# Altium PCB dsPIC33_CPU_ETH_Unit.PcbDoc (part 1 of 2)
Units mm, origin at the board's own origin, x right, y up, seen from the top; angles counter-clockwise.
Board outline 63.98 x 127 mm, 2 copper layers (Top Layer, Bottom Layer), stack 1.036 mm thick; 58 components, 100 nets, 442 pads, 227 vias.
Unrouted connection lines stored in the file: 57.
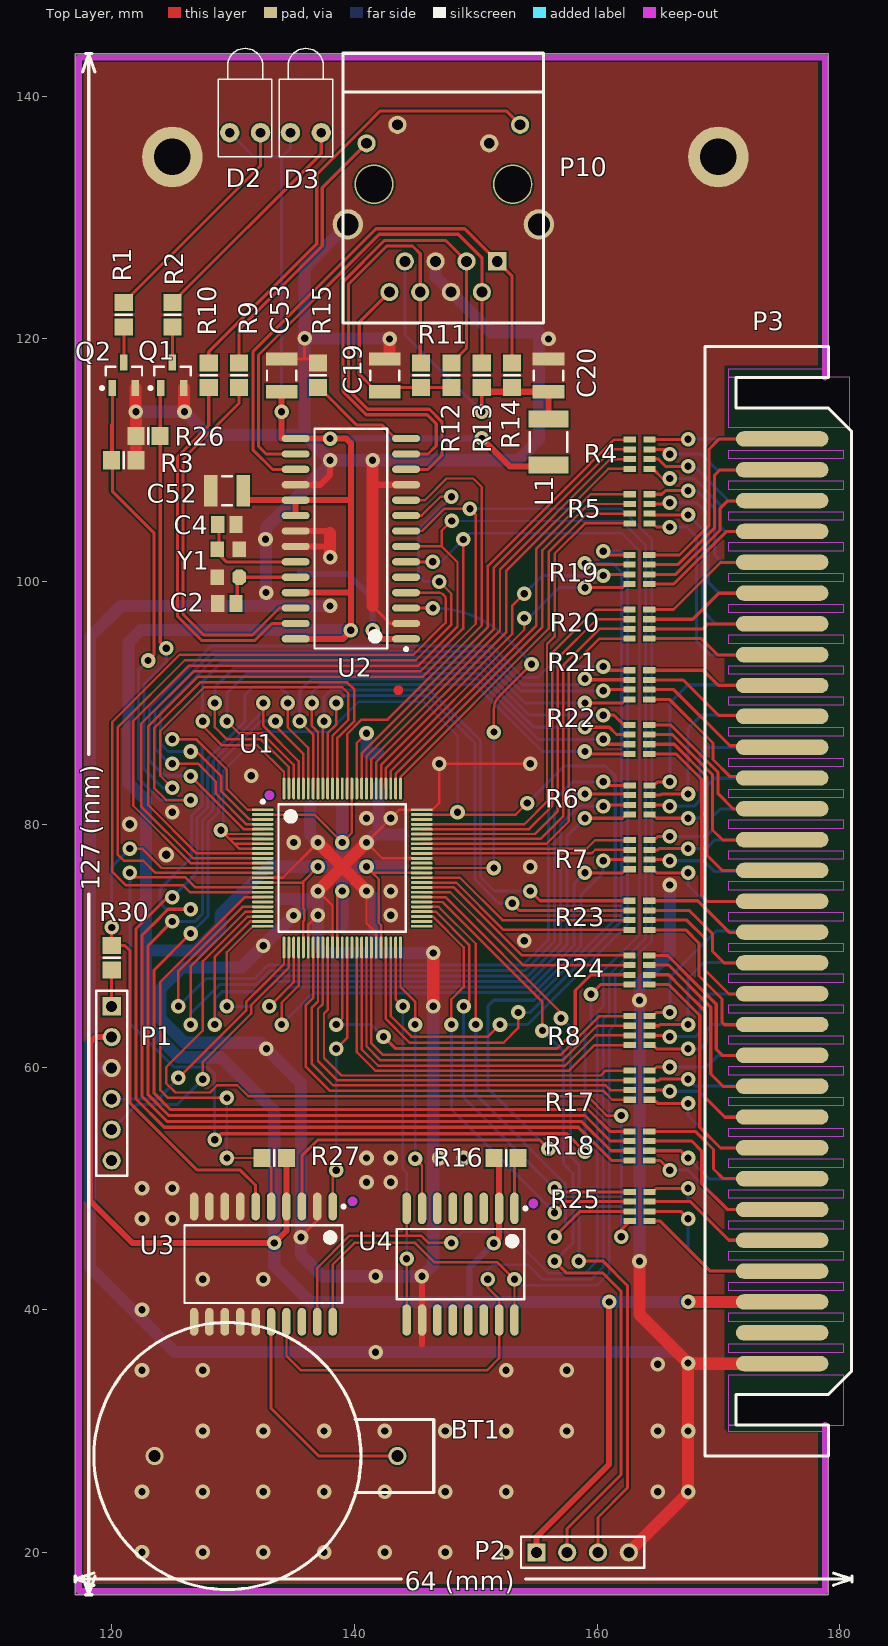
[diagram p0: Top Layer view]
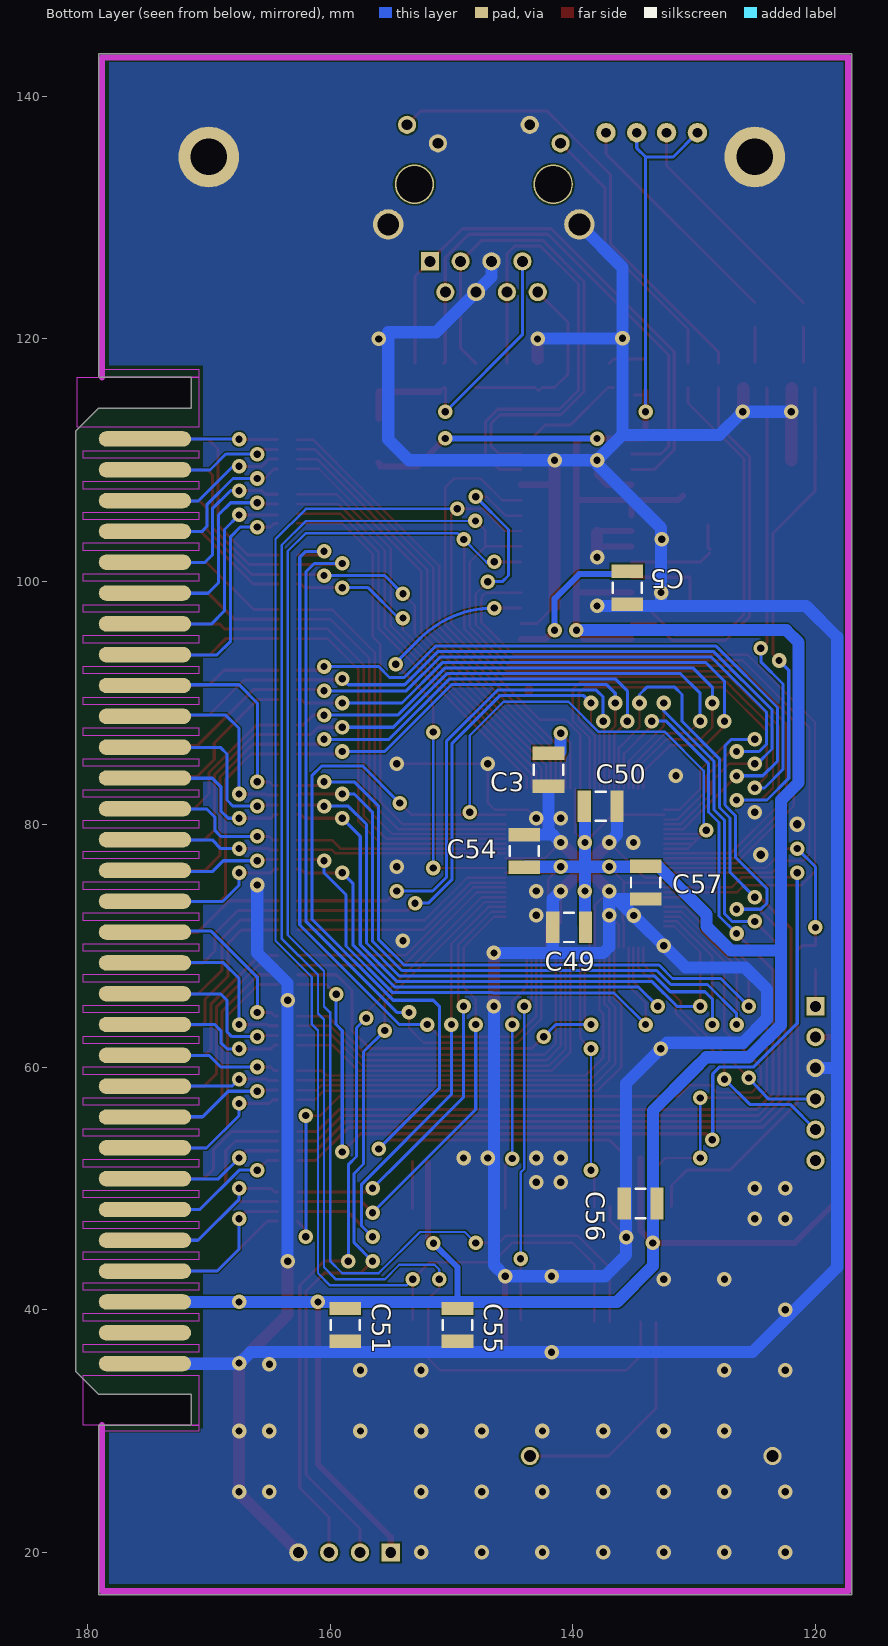
[diagram p1: Bottom Layer view, seen from below]

## Layer stack, top to bottom
Top Layer: signal copper 0.018
Dielectric: core 1, FR-4, Dk 4.8
Bottom Layer: signal copper 0.018

## Board outline
179.07,143.51 179.07,116.84 171.45,116.84 171.45,114.3 179.07,114.3 180.975,112.395 180.975,34.925 179.07,33.02 171.45,33.02 171.45,30.48 179.07,30.48 179.07,16.51 117,16.51 117,143.51

## Design rules (kind name [scope] priority, off if disabled: settings)
Clearance [All] p1: gap=0.14
ComponentClearance [All] p1: gap=0 collisioncheckmode=3 verticalgap=0 showdistances=FALSE
PlaneClearance [All] p1: clearance=0.5
PlaneConnect [All] p1: planeconnectstyle=Direct reliefexpansion=0.508 reliefentries=4 reliefconductorwidth=0.254 reliefairgap=0.254
PolygonConnect [All] p1: connectstyle=Direct reliefconductorwidth=0.254 reliefentries=4 polygonreliefangle="90 Angle"
RoutingCorners [All] p1: cornerstyle=Round minsetback=2.5 maxsetback=2.5
RoutingVias [All] p1: holewidth=0.7 width=1.2 viastyle="Through Hole" minholewidth=0.3 minwidth=0.8 maxholewidth=0.7 maxwidth=1.2
SMDNeckDown [All] p1: percent=300.000
SilkscreenOverComponentPads [All] p1: minsilkscreentomaskgap=0.254
SolderMaskExpansion [All] p1: expansion=0.102
Width [All] p1: maxlimit=1 minlimit=0.2 preferedwidth=0.2 checkconnectedcopper=TRUE
23 further rules are at their usual default settings.

## Components (designator, comment, footprint, x,y, rotation, side; value= is the part's Value field where it differs from the comment)
BT1 "Battery" "Battery Pad" 129.54,27.94 r0 top locked
C2 "Cap" CAPC2012L 129.5,98.2 r180 top
C3 "Cap" CAPC3225L 142,84.5 r90 bottom locked
C4 "Cap" CAPC2012L 129.5,104.7 r180 top
C5 "Cap" CAPC3225L 135.5,99.5 r270 bottom
C19 "Cap" CAPC3225L 142.5,117 r270 top
C20 "Cap" CAPC3225L 156,117 r270 top
C49 "Cap" CAPC3225L 140.3,71.5 r0 bottom
C50 "Cap" CAPC3225L 137.7,81.5 r180 bottom
C51 "Cap" CAPC3225L 158.75,38.75 r270 bottom
C52 "Cap" CAPC3225L 129.5,107.5 r180 top
C53 "Cap" CAPC3225L 134,117 r90 top
C54 "Cap" CAPC3225L 144,77.8 r90 bottom
C55 "Cap" CAPC3225L 149.5,38.75 r270 bottom
C56 "Cap" CAPC3225L 134.405,48.75 r0 bottom
C57 "Cap" CAPC3225L 134,75.2 r270 bottom
D2 "LED1" LED-1 131,137 r90 top
D3 "LED1" LED-1 136,137 r90 top
L1 "Inductor" INDC4532L 156,111.5 r90 top
P1 "Программатор" HDR1X6 120,65 r270 top
P2 "I2C" HDR1X4 155,20 r0 top
P3 "31x2 Slot" SL-62 180.34,35.56 r90 top
P10 "J00-0063NL" EthernetCON 147.332,132.748 r90 top
Q1 "BSS123" SOT23_N 125,117 r90 top
Q2 "BSS123" SOT23_N 121,117 r90 top
R1 "Res2" RESC2012M 121,122 r270 top
R2 "Res2" RESC2012M 125,122 r270 top
R3 "Res2" RESC2012M 121,110 r0 top
R4 "CAT16" CAT16 163.5,110.5 r270 top
R5 "CAT16" CAT16 163.5,106 r270 top
R6 "CAT16" CAT16 163.5,82 r270 top
R7 "CAT16" CAT16 163.5,77.5 r270 top
R8 "CAT16" CAT16 163.5,63 r270 top
R9 "Res2" RESC2012M 130.5,117 r90 top
R10 "Res2" RESC2012M 128,117 r90 top
R11 "Res2" RESC2012M 145.5,117 r90 top
R12 "Res2" RESC2012M 148,117 r90 top
R13 "Res2" RESC2012M 150.5,117 r90 top
R14 "Res2" RESC2012M 153,117 r90 top
R15 "Res2" RESC2012M 137,117 r270 top
R16 "Res2" RESC2012M 152.5,52.5 r180 top
R17 "CAT16" CAT16 163.5,58.5 r270 top locked
R18 "CAT16" CAT16 163.5,53.5 r90 top locked
R19 "CAT16" CAT16 163.5,101 r90 top
R20 "CAT16" CAT16 163.5,96.5 r90 top
R21 "CAT16" CAT16 163.5,91.5 r90 top
R22 "CAT16" CAT16 163.5,87 r90 top
R23 "CAT16" CAT16 163.5,72.5 r90 top
R24 "CAT16" CAT16 163.5,68 r90 top
R25 "CAT16" CAT16 163.5,48.5 r270 top
R26 "Res2" RESC2012M 123,112 r180 top
R27 "Res2" RESC2012M 133.4,52.5 r0 top
R30 "Res2" RESC2012M 120,69 r90 top
U1 "DSPIC33FJ256MC710T-I/PF" TQFP-PT100_N 139,76.4 r0 top locked
U2 "ENC28J60-I/SO" SOIC-SO28_N 139.712,103.538 r180 top
U3 "DS3234" SOIC20_M 132.5,43.75 r270 top locked
U4 "M25P128" SOIC127P1030-16M 148.75,43.75 r270 top locked
Y1 "Кварцевый резонатор" "HC 49SM" 130.512,100.363 r90 top

## Footprints (in the part's own frame and the unit in brackets; to place one, negate y for a bottom-side part, rotate by r counter-clockwise, add the part's x,y. Pads: shape width x height; smd on the part's side, far side on the other; paste and mask are expansions set on the pad)
"Battery Pad" [mm]
  round 1.5 hole 1: 1(14,0) 2(-6,0)
  silkscreen extent -11,-11 17,11, body extent -10.91,-10.98 17,10.98, height 6
CAPC2012L [mm] "Chip Capacitor, Body 2.0x1.3mm, IPC High Density"
  rect 1.1x1.4 smd: 1(-0.75,0) 2(0.75,0)
  body extent -1.1,-0.72 1.1,0.72, height 1.4
CAPC3225L [mm] "Chip Capacitor, Body 3.2x2.5mm, IPC High Density"
  rect 1.1x2.6 smd: 1(-1.35,0) 2(1.35,0)
  silkscreen extent -0.4,-1.2 0.4,1.2, body extent -1.7,-1.35 1.7,1.35, height 1.5
CAT16 [mm]
  rect 0.5x1 smd: 1(-1.2,-0.8) 2(-0.4,-0.8) 3(0.4,-0.8) 4(1.2,-0.8) 5(1.2,0.825) 6(0.4,0.825) 7(-0.4,0.825) 8(-1.2,0.825)
  body extent -1.75,-0.8 1.75,0.75, height 0.5
EthernetCON [mm] "Ethernet connector w/two LEDs"
  rect 1.5x1.5 hole 0.9: 1(-6.35,-4.445)
  round 1.5 hole 0.9: 2(-8.89,-3.175) 3(-6.35,-1.905) 4(-8.89,-0.635) 5(-6.35,0.635) 6(-8.89,1.905) 7(-6.35,3.175) 8(-8.89,4.445) 9(4.902,-6.325) 10(3.378,-3.785) 11(4.902,3.785) 12(3.378,6.325)
  round 2.5 hole 1.8: 13(-3.302,-7.874) 14(-3.302,7.874)
  round 3.25 hole 3 unplated: 15(0,-5.715) 16(0,5.715)
  silkscreen extent -11.43,-8.25 10.79,8.25, body extent -11.43,-8.25 11,8.25, height 13.97
"HC 49SM" [mm] "Кварцевый резонатор"
  oct 1.3x1.1 smd: 1(0,0)
  rect 1.3x1.1 smd: 2(2.3,0) 3(2.3,1.8) 4(0,1.8)
  body extent -0.45,-0.38 2.75,2.12, height 1.2
HDR1X4 [mm] "Connector; Header; 4 Position"
  rect 1.5x1.5 hole 0.9: 1(0,0)
  round 1.5 hole 0.9: 2(2.54,0) 3(5.08,0) 4(7.62,0)
  silkscreen extent -1.27,-1.27 8.89,1.27
HDR1X6 [mm] "Connector; Header; 6 Position"
  rect 1.5x1.5 hole 0.9: 1(0,0)
  round 1.5 hole 0.9: 2(2.54,0) 3(5.08,0) 4(7.62,0) 5(10.16,0) 6(12.7,0)
  silkscreen extent -1.27,-1.27 13.97,1.27
INDC4532L [mm] "Chip Inductor, Body 4.5x3.2mm, IPC High Density"
  rect 1.4x3.3 smd: 1(-1.9,0) 2(1.9,0)
  silkscreen extent -0.8,-1.55 0.8,1.55, body extent -2.4,-1.7 2.4,1.7, height 0.55
LED-1 [mm] "Typical RED GaAs LED; 2 Leads"
  round 1.6 hole 0.8: 1(0,1.27) 2(0,-1.27)
  silkscreen extent -2,-2.2 6.95,2.2
RESC2012M [mm] "Chip Resistor, Body 2.0x1.2mm, IPC Low Density"
  rect 1.4x1.5 smd: 1(-1,0) 2(1,0)
  silkscreen extent 0,-0.65 0,0.65, body extent -1.07,-0.7 1.07,0.7, height 0.7
SL-62 [mm]
  oval 1.27x7.62 smd: 1(0,5.08) 2(2.54,5.08) 3(5.08,5.08) 4(7.62,5.08) 5(10.16,5.08) 6(12.7,5.08) 7(15.24,5.08) 8(17.78,5.08) 9(20.32,5.08) 10(22.86,5.08) 11(25.4,5.08) 12(27.94,5.08) 13(30.48,5.08) 14(33.02,5.08) 15(35.56,5.08) 16(38.1,5.08) 17(40.64,5.08) 18(43.18,5.08) 19(45.72,5.08) 20(48.26,5.08) 21(50.8,5.08) 22(53.34,5.08) 23(55.88,5.08) 24(58.42,5.08) 25(60.96,5.08) 26(63.5,5.08) 27(66.04,5.08) 28(68.58,5.08) 29(71.12,5.08) 30(73.66,5.08) 31(76.2,5.08)
  oval 1.27x7.62 smd far side: 32(0,5.08) 33(2.54,5.08) 34(5.08,5.08) 35(7.62,5.08) 36(10.16,5.08) 37(12.7,5.08) 38(15.24,5.08) 39(17.78,5.08) 40(20.32,5.08) 41(22.86,5.08) 42(25.4,5.08) 43(27.94,5.08) 44(30.48,5.08) 45(33.02,5.08) 46(35.56,5.08) 47(38.1,5.08) 48(40.64,5.08) 49(43.18,5.08) 50(45.72,5.08) 51(48.26,5.08) 52(50.8,5.08) 53(53.34,5.08) 54(55.88,5.08) 55(58.42,5.08) 56(60.96,5.08) 57(63.5,5.08) 58(66.04,5.08) 59(68.58,5.08) 60(71.12,5.08) 61(73.66,5.08) 62(76.2,5.08)
  Keep-Out Layer region: 74.612,0 75.248,0 75.248,9.525 74.612,9.525
  Keep-Out Layer region: 72.072,0 72.707,0 72.707,9.525 72.072,9.525
  Keep-Out Layer region: 69.532,0 70.168,0 70.168,9.525 69.532,9.525
  Keep-Out Layer region: 66.992,0 67.627,0 67.627,9.525 66.992,9.525
  Keep-Out Layer region: 64.453,0 65.087,0 65.087,9.525 64.453,9.525
  Keep-Out Layer region: 61.912,0 62.547,0 62.547,9.525 61.912,9.525
  Keep-Out Layer region: 59.372,0 60.008,0 60.008,9.525 59.372,9.525
  Keep-Out Layer region: 56.832,0 57.468,0 57.468,9.525 56.832,9.525
  Keep-Out Layer region: 54.292,0 54.927,0 54.927,9.525 54.292,9.525
  Keep-Out Layer region: 51.752,0 52.387,0 52.387,9.525 51.752,9.525
  Keep-Out Layer region: 49.212,0 49.847,0 49.847,9.525 49.212,9.525
  Keep-Out Layer region: 46.672,0 47.307,0 47.307,9.525 46.672,9.525
  Keep-Out Layer region: 44.133,0 44.767,0 44.767,9.525 44.133,9.525
  Keep-Out Layer region: 41.593,0 42.227,0 42.227,9.525 41.593,9.525
  Keep-Out Layer region: 39.052,0 39.688,0 39.688,9.525 39.052,9.525
  Keep-Out Layer region: 36.512,0 37.148,0 37.148,9.525 36.512,9.525
  Keep-Out Layer region: 33.972,0 34.608,0 34.608,9.525 33.972,9.525
  Keep-Out Layer region: 31.432,0 32.067,0 32.067,9.525 31.432,9.525
  Keep-Out Layer region: 28.892,0 29.527,0 29.527,9.525 28.892,9.525
  Keep-Out Layer region: 26.352,0 26.987,0 26.987,9.525 26.352,9.525
  Keep-Out Layer region: 23.812,0 24.447,0 24.447,9.525 23.812,9.525
  Keep-Out Layer region: 21.273,0 21.907,0 21.907,9.525 21.273,9.525
  Keep-Out Layer region: 18.732,0 19.367,0 19.367,9.525 18.732,9.525
  Keep-Out Layer region: 16.192,0 16.828,0 16.828,9.525 16.192,9.525
  Keep-Out Layer region: 13.652,0 14.287,0 14.287,9.525 13.652,9.525
  Keep-Out Layer region: 11.112,0 11.747,0 11.747,9.525 11.112,9.525
  Keep-Out Layer region: 8.572,0 9.207,0 9.207,9.525 8.572,9.525
  Keep-Out Layer region: 6.032,0 6.667,0 6.667,9.525 6.032,9.525
  Keep-Out Layer region: 3.492,0 4.127,0 4.127,9.525 3.492,9.525
  Keep-Out Layer region: 0.953,0 1.587,0 1.587,9.525 0.952,9.525
  Keep-Out Layer region: -5.08,0 -0.953,0 -0.953,9.525 -5.08,9.525
  Keep-Out Layer region: 77.153,-0.5 81.3,-0.5 81.3,9.525 77.153,9.525
  silkscreen extent -7.62,-0.64 83.82,11.43
SOIC20_M [mm] "SOIC, 20-Leads, Body 12.8x7.5mm, Pitch 1.27mm, IPC Low Density"
  oval 2.3x0.7 smd: 1(-4.75,5.715) 2(-4.75,4.445) 3(-4.75,3.175) 4(-4.75,1.905) 5(-4.75,0.635) 6(-4.75,-0.635) 7(-4.75,-1.905) 8(-4.75,-3.175) 9(-4.75,-4.445) 10(-4.75,-5.715) 11(4.75,-5.715) 12(4.75,-4.445) 13(4.75,-3.175) 14(4.75,-1.905) 15(4.75,-0.635) 16(4.75,0.635) 17(4.75,1.905) 18(4.75,3.175) 19(4.75,4.445) 20(4.75,5.715)
  silkscreen extent -4.87,-6.5 3.2,6.74, body extent -3.8,-6.5 3.8,6.5, height 2.67
SOIC127P1030-16M [mm] "SOIC, 16-Leads, Body 10.3x7.5mm, Pitch 1.27mm, IPC Low Density"
  oval 2.6x0.7 smd: 1(-4.6,4.445) 2(-4.6,3.175) 3(-4.6,1.905) 4(-4.6,0.635) 5(-4.6,-0.635) 6(-4.6,-1.905) 7(-4.6,-3.175) 8(-4.6,-4.445) 9(4.6,-4.445) 10(4.6,-3.175) 11(4.6,-1.905) 12(4.6,-0.635) 13(4.6,0.635) 14(4.6,1.905) 15(4.6,3.175) 16(4.6,4.445)
  silkscreen extent -4.72,-5.25 2.9,5.47, body extent -3.75,-5.25 3.75,5.25, height 2.65
SOIC-SO28_N [mm] "SOIC, 28-Leads, Body 17.9x7.5mm, Pitch 1.27mm, IPC Medium Density"
  oval 2.3x0.6 smd: 1(-4.55,8.255) 2(-4.55,6.985) 3(-4.55,5.715) 4(-4.55,4.445) 5(-4.55,3.175) 6(-4.55,1.905) 7(-4.55,0.635) 8(-4.55,-0.635) 9(-4.55,-1.905) 10(-4.55,-3.175) 11(-4.55,-4.445) 12(-4.55,-5.715) 13(-4.55,-6.985) 14(-4.55,-8.255) 15(4.55,-8.255) 16(4.55,-6.985) 17(4.55,-5.715) 18(4.55,-4.445) 19(4.55,-3.175) 20(4.55,-1.905) 21(4.55,-0.635) 22(4.55,0.635) 23(4.55,1.905) 24(4.55,3.175) 25(4.55,4.445) 26(4.55,5.715) 27(4.55,6.985) 28(4.55,8.255)
  silkscreen extent -4.67,-9.05 3,9.23, body extent -3.8,-9.06 3.8,9.06, height 2.65
SOT23_N [mm] "SOT23, 3-Leads, Body 2.9x1.3mm, Pitch 0.95mm, Lead Span 2.3mm, IPC Medium Density"
  rect 1.3x0.6 smd: 1(-1.05,0.95) 2(-1.05,-0.95) 3(1.05,0)
  silkscreen extent -1.17,-1.5 0.7,1.92, body extent -0.7,-1.5 0.7,1.5, height 1.1
TQFP-PT100_N [mm] "Thin QFP, 100-Leads, Body 12x12mm, Pitch 0.4mm, IPC Medium Density"
  oval 1.8x0.24 smd: 1(-6.55,4.8) 2(-6.55,4.4) 3(-6.55,4) 4(-6.55,3.6) 5(-6.55,3.2) 6(-6.55,2.8) 7(-6.55,2.4) 8(-6.55,2) 9(-6.55,1.6) 10(-6.55,1.2) 11(-6.55,0.8) 12(-6.55,0.4) 13(-6.55,0) 14(-6.55,-0.4) 15(-6.55,-0.8) 16(-6.55,-1.2) 17(-6.55,-1.6) 18(-6.55,-2) 19(-6.55,-2.4) 20(-6.55,-2.8) 21(-6.55,-3.2) 22(-6.55,-3.6) 23(-6.55,-4) 24(-6.55,-4.4) 25(-6.55,-4.8) 51(6.55,-4.8) 52(6.55,-4.4) 53(6.55,-4) 54(6.55,-3.6) 55(6.55,-3.2) 56(6.55,-2.8) 57(6.55,-2.4) 58(6.55,-2) 59(6.55,-1.6) 60(6.55,-1.2) 61(6.55,-0.8) 62(6.55,-0.4) 63(6.55,0) 64(6.55,0.4) 65(6.55,0.8) 66(6.55,1.2) 67(6.55,1.6) 68(6.55,2) 69(6.55,2.4) 70(6.55,2.8) 71(6.55,3.2) 72(6.55,3.6) 73(6.55,4) 74(6.55,4.4) 75(6.55,4.8)
  oval 0.24x1.8 smd: 26(-4.8,-6.55) 27(-4.4,-6.55) 28(-4,-6.55) 29(-3.6,-6.55) 30(-3.2,-6.55) 31(-2.8,-6.55) 32(-2.4,-6.55) 33(-2,-6.55) 34(-1.6,-6.55) 35(-1.2,-6.55) 36(-0.8,-6.55) 37(-0.4,-6.55) 38(0,-6.55) 39(0.4,-6.55) 40(0.8,-6.55) 41(1.2,-6.55) 42(1.6,-6.55) 43(2,-6.55) 44(2.4,-6.55) 45(2.8,-6.55) 46(3.2,-6.55) 47(3.6,-6.55) 48(4,-6.55) 49(4.4,-6.55) 50(4.8,-6.55) 76(4.8,6.55) 77(4.4,6.55) 78(4,6.55) 79(3.6,6.55) 80(3.2,6.55) 81(2.8,6.55) 82(2.4,6.55) 83(2,6.55) 84(1.6,6.55) 85(1.2,6.55) 86(0.8,6.55) 87(0.4,6.55) 88(0,6.55) 89(-0.4,6.55) 90(-0.8,6.55) 91(-1.2,6.55) 92(-1.6,6.55) 93(-2,6.55) 94(-2.4,6.55) 95(-2.8,6.55) 96(-3.2,6.55) 97(-3.6,6.55) 98(-4,6.55) 99(-4.4,6.55) 100(-4.8,6.55)
  silkscreen extent -6.67,-5.25 5.25,5.59, body extent -6,-6 6,6, height 1.2

## Part data
BT1: "Multicell Battery"
C2 C3 C4 C5 C19 C20 C49 C50 C51 C52 C53 C54 C55 C56 C57: "Capacitor"
D2 D3: "Typical RED GaAs LED"
P1: library part "Header 6", "Header, 6-Pin"
P2: library part "Header 4", "Header, 4-Pin"
Q1 Q2: "N-channel Enhancement Mode Vertical D-MOSFET"
R1 R2 R3 R9 R10 R11 R12 R13 R14 R15 R16 R26 R27 R30: "Resistor"
R4 R5 R6 R7 R8 R17 R18 R19 R20 R21 R22 R23 R24 R25: "Резисторная сборка"
U1: "High-Performance 16-bit Digital Signal Controller, 256 KB Flash, 30 KB RAM, 100-Pin TQFP, Industrial Temperature, Tape and Reel"
U2: "Stand-Alone Ethernet Controller with SPI Interface, 28-Pin SOIC, Industrial Temperature"
U3: "Extremely Accurate SPI Bus RTC with  Integrated Crystal and SRAM"
Y1: library part XTAL

## Free pads (board coordinates)
  round 5 hole 3: 0(125,135) 0(170,135)

## Via types
v1: diameter 1.2, hole 0.6, Top Layer to Bottom Layer, 225 vias
v2: diameter 1.27, hole 0.711, Top Layer to Bottom Layer, 2 vias

## Nets (pads, with @x,y where several pads share a name; then routed paths per layer and width w, separated by ;. In a path a pad name is that pad's centre, name@x,y a point inside that pad or via, vN(x,y) a via of type N, cw(c..) or ccw(c..) an arc to the next point about the centre after c; other vN are vias at no path point)
DRV_DIR_A: P3.39 R17.4 R17.5 U1.32 | length 51
  Top Layer w0.2: U1.32@136.6,69.85 136.6,65.7 136,65.1 136,60 137.95,58.05 160.5,58.05 161.25,57.3 R17.4@162.7,57.3
  Top Layer w0.254: R17.5@164.325,57.3 164.7,57.3 165,57 v1(167.5,57)
  Bottom Layer w0.254: v1(167.5,57) 167.5,56 170.18,53.32 P3.39@175.22,53.32
DRV_DIR_B: P3.40 R17.3 R17.6 U1.33 | length 48.9
  Top Layer w0.2: U1.33@137,69.85 137,65.4 136.5,64.9 136.5,60.25 138.25,58.5 160.7,58.5 161.1,58.1 R17.3@162.7,58.1
  Top Layer w0.254: R17.6@164.325,58.1 165.9,58.1 v1(166,58)
  Bottom Layer w0.254: v1(166,58) 168.4,58 170.5,55.9 175.18,55.9 175.22,55.86 P3.40@175.08,56
DRV_DIR_C: P3.41 R17.2 R17.7 U1.34 | length 47.2
  Top Layer w0.2: U1.34@137.4,69.85 137.4,65.2 137,64.8 137,60.5 138.6,58.9 R17.2@162.7,58.9
  Top Layer w0.254: R17.7@164.325,58.9 165.1,58.9 165.2,59 v1(167.5,59)
  Bottom Layer w0.254: v1(167.5,59) 168.08,58.42 P3.41@175.26,58.42 ; P3.41@175.12,58.5 P3.41@175.22,58.4
DRV_DIR_D: P3.42 R17.1 R17.8 U1.35 | length 46.6
  Top Layer w0.2: U1.35@137.8,69.85 137.8,64.7 137.5,64.4 137.5,60.75 138.95,59.3 160.3,59.3 160.7,59.7 R17.1@162.7,59.7
  Top Layer w0.254: R17.8@164.325,59.7 164.6,59.7 164.9,60 v1(166,60)
  Bottom Layer w0.254: v1(166,60) 169,60 169.94,60.94 P3.42@175.22,60.94
DRV_DIR_E: P3.43 R8.4 R8.5 U1.41 | length 45.1
  Top Layer w0.2: U1.41@140.2,69.85 140.2,61.224 141.724,59.7 157.7,59.7 159.8,61.8 R8.4@162.7,61.8
  Top Layer w0.254: R8.5@164.325,61.8 164.6,61.8 164.9,61.5 v1(167.5,61.5)
  Bottom Layer w0.254: v1(167.5,61.5) 168.5,61.5 169,62 169,63 169.5,63.5 175.2,63.5 P3.43@175.22,63.48
DRV_DIR_F: P3.44 R8.3 R8.6 U1.42 | length 46
  Top Layer w0.2: U1.42@140.6,69.85 140.6,61.466 141.966,60.1 157.35,60.1 159.85,62.6 R8.3@162.7,62.6
  Top Layer w0.254: R8.6@164.325,62.6 165.9,62.6 v1(166,62.5)
  Bottom Layer w0.254: v1(166,62.5) 168.1,62.5 168.5,62.9 168.5,65.5 169.02,66.02 P3.44@175.22,66.02
DRV_DIR_G: P3.45 R8.2 R8.7 U1.43 | length 46.8
  Top Layer w0.2: U1.43@141,69.85 141,61.708 142.162,60.546 157.146,60.546 160,63.4 R8.2@162.7,63.4
  Top Layer w0.254: R8.7@164.325,63.4 165.1,63.4 165.2,63.5 v1(167.5,63.5)
  Bottom Layer w0.254: v1(167.5,63.5) 167.5,67.3 168.8,68.6 175.18,68.6 P3.45@175.22,68.56
DRV_DIR_H: P3.46 R8.1 R8.8 U1.44 | length 46.5
  Top Layer w0.2: U1.44@141.4,69.85 141.4,61.95 142.35,61 157,61 160.2,64.2 R8.1@162.7,64.2
  Top Layer w0.254: R8.8@164.325,64.2 164.6,64.2 164.9,64.5 v1(166,64.5)
  Bottom Layer w0.254: v1(166,64.5) 166,67.4 169.8,71.2 175.12,71.2 P3.46@175.22,71.1
DRV_ENA_A: P3.47 R7.4 R7.5 U1.28 | length 55.6
  Top Layer w0.2: v1(133,65) 135,67 U1.28@135,69.85
  Top Layer w0.254: v1(159,76) 162.1,76 162.4,76.3 R7.4@162.7,76.3 ; R7.5@164.325,76.3 164.6,76.3 164.9,76 v1(167.5,76)
  Bottom Layer w0.254: v1(133,65) 134.584,66.584 154.652,66.584 158.1,70.032 158.1,75.1 v1(159,76) ; v1(167.5,76) 167.5,75 168.86,73.64 P3.47@175.22,73.64
DRV_ENA_B: P3.48 R7.3 R7.6 U1.29 | length 56
  Top Layer w0.2: v1(134,63.5) 134,65.3 135.4,66.7 U1.29@135.4,69.85
  Top Layer w0.254: v1@160.4,77.1 R7.3@162.7,77.1 ; R7.6@164.325,77.1 165.9,77.1 v1(166,77)
  Bottom Layer w0.254: v1(134,63.5) 136.6,66.1 146.58,66.1 146.61,66.13 154.84,66.13 155.126,66.416 158.688,69.978 158.688,74.184 160.5,75.996 v1(160.5,77) ; v1(166,77) 168.8,77 169.7,76.1 175.14,76.1 175.22,76.18 P3.48@175.04,76
DRV_ENA_C: P3.49 R7.2 R7.7 U1.66 | length 28.5
  Top Layer w0.2: U1.66@145.55,77.6 159.55,77.6 159.85,77.9 R7.2@162.7,77.9
  Top Layer w0.254: R7.7@164.325,77.9 165,77.9 165.1,78 v1(167.5,78)
  Bottom Layer w0.254: v1(167.5,78) 169,78 169.72,78.72 P3.49@175.22,78.72
DRV_ENA_D: P3.50 R7.1 R7.8 U1.67 | length 30
  Top Layer w0.2: U1.67@145.55,78 159.15,78 159.85,78.7 R7.1@162.7,78.7
  Top Layer w0.254: R7.8@164.325,78.7 164.7,78.7 165,79 v1(166,79)
  Bottom Layer w0.254: v1(166,79) 169,79 169.5,79.5 169.5,80.6 170.16,81.26 P3.50@175.22,81.26
DRV_ENA_E: P3.51 R6.4 R6.5 U1.25 | length 66.8
  Top Layer w0.2: v1(129.5,65) 129.5,69.458 131.642,71.6 U1.25@132.45,71.6
  Top Layer w0.254: v1(159,80.5) 162.1,80.5 162.4,80.8 R6.4@162.7,80.8 ; R6.5@164.325,80.8 164.6,80.8 164.9,80.5 v1(167.5,80.5)
  Bottom Layer w0.254: v1(129.5,65) 131.405,65 133.443,67.038 154.464,67.038 157.513,70.087 157.513,79.013 v1(159,80.5) ; v1(167.5,80.5) 168.4,80.5 169,81.1 169,83.1 169.7,83.8 P3.51@175.22,83.8
DRV_ENA_F: P3.52 R6.3 R6.6 U1.24 | length 74.6
  Top Layer w0.2: v1(128.5,63.5) 128.5,69.1 131.4,72 U1.24@132.45,72
  Top Layer w0.254: v1(160.5,81.5) 160.6,81.6 R6.3@162.7,81.6 ; R6.6@164.325,81.6 165.9,81.6 v1(166,81.5)
  Bottom Layer w0.254: v1(128.5,63.5) 128.5,65.6 129.1,66.2 131.963,66.2 133.255,67.492 154.276,67.492 157,70.216 157,80 158.5,81.5 v1(160.5,81.5) ; v1(166,81.5) 168,81.5 168.5,82 168.5,85.8 169.04,86.34 P3.52@175.22,86.34
DRV_ENA_G: P3.53 R6.2 R6.7 U1.22 | length 80.3
  Top Layer w0.2: v1(126.5,63.5) 126.5,68.284 131.016,72.8 U1.22@132.45,72.8
  Top Layer w0.254: v1(159,82.5) 162.6,82.5 R6.2@162.7,82.4 ; R6.7@164.325,82.4 165.2,82.4 165.3,82.5 v1(167.5,82.5)
  Bottom Layer w0.254: v1(126.5,63.5) 126.5,64.4 128.9,66.8 131.921,66.8 133.067,67.946 154.088,67.946 156.5,70.358 156.5,81 158,82.5 v1(159,82.5) ; v1(167.5,82.5) 167.5,87.9 168.6,89 175.1,89 P3.53@175.22,88.88
DRV_ENA_H: P3.54 R6.1 R6.8 U1.21 | length 81.7
  Top Layer w0.2: v1(125.5,65) 125.5,67.926 130.774,73.2 U1.21@132.45,73.2
  Top Layer w0.254: v1(160.5,83.5) 160.8,83.2 R6.1@162.7,83.2 ; R6.8@164.325,83.2 164.7,83.2 165,83.5 v1(166,83.5)
  Bottom Layer w0.254: v1(125.5,65) 127.8,67.3 131.779,67.3 132.879,68.4 153.9,68.4 155.996,70.496 155.996,81.496 158,83.5 v1(160.5,83.5) ; v1(166,83.5) 166,90 167.5,91.5 175.14,91.5 P3.54@175.22,91.42
DRV_MS1: P3.7 R18.4 R18.5 U1.96 | length 96
  Top Layer w0.2: v1(133.5,88.5) 133.5,88.1 135.8,85.8 U1.96@135.8,82.95
  Top Layer w0.254: 123.487,67.987 v1(126.5,71) ; 123.5,67.974 123.5,57.826 124.826,56.5 159.25,56.5 161.05,54.7 R18.5@162.675,54.7 ; R18.4@164.3,54.7 168.1,54.7 169.6,53.2 169.6,51.6 170.4,50.8 175.2,50.8 P3.7@175.22,50.78
  Bottom Layer w0.254: v1(126.5,71) 127.946,72.446 127.946,80.146 128.773,80.973 128.773,80.986 128.824,81.037 128.824,85.024 132.3,88.5 v1(133.5,88.5)
DRV_MS2: P3.6 R18.3 R18.6 U1.97 | length 101.7
  Top Layer w0.2: v1(132.5,90) 132.5,88.1 135.4,85.2 U1.97@135.4,82.95
  Top Layer w0.254: 123,70.016 123,57.7 124.7,56 159,56 161.1,53.9 R18.6@162.675,53.9 ; 123.008,70.008 v1(125,72) ; R18.3@164.3,53.9 167.8,53.9 168.6,53.1 168.6,50.4 170.76,48.24 P3.6@175.22,48.24
  Bottom Layer w0.254: v1(125,72) 126.875,72 127.492,72.617 127.492,80.334 128.319,81.161 128.319,81.174 128.37,81.225 128.37,85.212 132.5,89.342 v1(132.5,90)
DRV_RESET: P3.38 R18.2 R18.7 U1.1 | length 102.6
  Top Layer w0.2: v1(125,87) 127,87 129.5,84.5 129.5,82.9 131.2,81.2 U1.1@132.45,81.2
  Top Layer w0.254: v1(126.5,73) 124.642,73 124.604,72.962 124.602,72.962 124.038,72.398 124.038,72.396 122.5,70.858 122.5,57.6 124.6,55.5 158.75,55.5 161.15,53.1 R18.7@162.675,53.1 ; R18.2@164.3,53.1 166.9,53.1 v1(167.5,52.5)
  Bottom Layer w0.254: v1(125,87) 126.925,87 127.462,86.463 127.462,81.602 127.411,81.551 127.411,81.537 126.584,80.71 126.584,77.284 124,74.7 124,73.5 124.5,73 v1(126.5,73) ; v1(167.5,52.5) 169.22,50.78 P3.38@175.22,50.78
DRV_SLEEP: P3.37 R18.1 R18.8 U1.95 | length 105.1
  Top Layer w0.2: v1(134.5,90) 134.5,88 136.2,86.3 U1.95@136.2,82.95
  Top Layer w0.254: v1(125,74) 124.598,74 122,71.402 122,57.37 124.332,55.038 158.462,55.038 161.2,52.3 R18.8@162.675,52.3 ; R18.1@164.3,52.3 165.2,52.3 v1(166,51.5)
  Bottom Layer w0.254: v1(125,74) 127.038,76.038 127.038,80.522 127.865,81.349 127.865,81.362 127.916,81.414 127.916,85.4 131,88.484 131,90.7 131.6,91.3 133.9,91.3 134.5,90.7 v1(134.5,90) ; v1(166,51.5) 167.5,51.5 170.76,48.24 P3.37@175.22,48.24
DRV_STEP_A: P3.55 R5.4 R5.5 U1.72 | length 59.4
  Top Layer w0.2: U1.72@145.55,80 154,80 155.875,81.875 155.875,94.85 156.5,95.475 156.5,102.3 159,104.8 R5.4@162.7,104.8
  Top Layer w0.254: R5.5@164.325,104.8 164.6,104.8 164.9,104.5 v1(166,104.5)
  Bottom Layer w0.254: v1(166,104.5) 167.4,104.5 168.2,103.7 168.2,95.1 169.34,93.96 P3.55@175.22,93.96
DRV_STEP_B: P3.56 R5.3 R5.6 U1.76 | length 51.1
  Top Layer w0.2: U1.76@143.8,82.95 143.8,83.911 156.014,96.126 156.014,102.435 ; 156.004,102.446 159.158,105.6 R5.3@162.7,105.6
  Top Layer w0.254: R5.6@164.325,105.5 v1(167.5,105.5)
  Bottom Layer w0.254: v1(167.5,105.5) 168.7,104.3 168.7,97.6 169.8,96.5 P3.56@175.22,96.5
DRV_STEP_C: P3.57 R5.2 R5.7 U1.77 | length 50.7
  Top Layer w0.2: U1.77@143.4,82.95 143.4,84.153 155.5,96.253 155.5,102.584 159.316,106.4 R5.2@162.7,106.4
  Top Layer w0.254: R5.7@164.325,106.4 165.9,106.4 v1(166,106.5)
  Bottom Layer w0.254: v1(166,106.5) 168.2,106.5 169.2,105.5 169.2,99.9 170.06,99.04 P3.57@175.22,99.04
DRV_STEP_D: P3.58 R5.1 R5.8 U1.78 | length 50
  Top Layer w0.2: U1.78@143,82.95 143,84.395 155,96.395 155,102.726 159.474,107.2 R5.1@162.7,107.2
  Top Layer w0.254: R5.8@164.325,107.2 165.34,107.2 165.64,107.5 v1(167.5,107.5)
  Bottom Layer w0.254: v1(167.5,107.5) 168.21,107.5 169.7,106.01 169.7,102.2 170.32,101.58 P3.58@175.22,101.58
DRV_STEP_E: P3.59 R4.4 R4.5 U1.81 | length 50.1
  Top Layer w0.2: U1.81@141.8,82.95 141.8,85.122 152.5,95.822 152.5,100.868 160.932,109.3 R4.4@162.7,109.3
  Top Layer w0.254: R4.5@164.325,109.3 164.6,109.3 165.4,108.5 v1(166,108.5)
  Bottom Layer w0.254: v1(166,108.5) 168,108.5 170.154,106.346 170.154,104.546 170.58,104.12 P3.59@175.22,104.12
DRV_STEP_F: P3.60 R4.3 R4.6 U1.82 | length 53
  Top Layer w0.2: U1.82@141.4,82.95 141.4,85.364 152,95.964 152,101.01 161.09,110.1 R4.3@162.7,110.1
  Top Layer w0.254: R4.6@164.325,110.1 165.042,110.1 165.642,109.5 v1(167.5,109.5)
  Bottom Layer w0.254: v1(167.5,109.5) 168,109.5 170.84,106.66 175.22,106.66 171.44,106.66
DRV_STEP_G: P3.61 R4.2 R4.7 U1.83 | length 49.3
  Top Layer w0.2: U1.83@141,82.95 141,85.606 151.5,96.106 151.5,101.152 161.248,110.9 R4.2@162.7,110.9
  Top Layer w0.254: R4.7@164.325,110.9 165.6,110.9 v1(166,110.5)
  Bottom Layer w0.254: v1@166.1,110.513 168.587,110.513 169.9,109.2 P3.61@175.22,109.2
DRV_STEP_H: P3.62 R4.1 R4.8 U1.84 | length 49.5
  Top Layer w0.2: U1.84@140.6,82.95 140.6,85.848 150.976,96.224 ; 151,96.224 151,101.294 157.434,107.728 161.406,111.7 R4.1@162.7,111.7
  Top Layer w0.254: R4.8@164.325,111.7 v1@167.46,111.7
  Bottom Layer w0.254: v1(167.5,111.74) P3.62@175.22,111.74
ESPI_SCK: U1.10 U2.8 U3.20 U4.16 | length 175.7
  Top Layer w0.2: U1.10@132.45,77.6 127,77.6 123.025,81.575 123.025,88.095 127.084,92.154 145.622,92.154 150,96.532 150,105.5 v1@149.5,106 ; U3.20@138.215,39 138.215,43.715 140,45.5 145,45.5 146.6,43.9 151.795,43.9 v1(153.195,42.5) U4.16@153.195,39.15 ; U2.8@144.262,104.173 145.573,104.173 147.4,106 v1@149.5,106 ; v1@149.9,105.6 v1@149.5,106
  Bottom Layer w0.2: v1@149.5,106 162,106 164.5,103.5 164.5,70.4 161.5,67.4 161.5,63.5 161,63 161,43 160,42 153.695,42 v1(153.195,42.5)
  other v1: 149.523,106
ESPI_SDI: U1.12 U2.7 U3.17 U4.15 | length 179.3
  Top Layer w0.2: U1.12@132.45,76.8 126.5,76.8 121.775,81.525 121.775,88.502 126.335,93.062 145.246,93.062 148.5,96.316 148.5,101.6 147.197,102.903 ; U3.17@134.405,39 134.405,36.195 135.6,35 150.925,35 151.925,36 U4.15@151.925,39.15 151.925,40.875 151,41.8 v1(151,42.5) ; U2.7@144.262,102.903 146.9,102.903 147.2,102.903 147.2,104.2 v1@148,105
  Bottom Layer w0.2: v1@148,105 162,105 164,103 164,70.6 161,67.6 161,64.4 160.5,63.9 160.5,43.5 159.5,42.5 155.5,42.5 154.3,43.7 151.4,43.7 151,43.3 v1(151,42.5)
  other v1: 148.023,105
ESPI_SDO: U1.11 U2.6 U3.19 U4.8 | length 170
  Top Layer w0.2: U1.11@132.45,77.2 126.7,77.2 122.425,81.475 122.425,88.283 126.75,92.608 145.434,92.608 148.956,96.13 v1@148.956,103.479 ; U3.19@136.945,39 136.945,43.445 139.6,46.1 145.5,46.1 146.1,45.5 v1(148,45.5) ; 144.305,46.1 U4.8@144.305,48.35
  Top Layer w0.254: U2.6@144.262,101.633 v1(146.467,101.633) v1@146.5,101.6
  Bottom Layer w0.2: 147.1,101.6 149.5,104 152.5,104 162,104 163.5,102.5 163.5,70.9 160.5,67.9 160.5,65 160,64.5 160,44 159,43 156,43 152.6,46.4 148.9,46.4 148.3,45.8 148.3,45.5 v1(148,45.5)
  Bottom Layer w0.254: v1@146.5,101.6 147.1,101.6
  other v1: 148.979,103.479
ETH_INT: U1.18 U2.4 | length 61.8
  Top Layer w0.2: U1.18@132.45,74.4 126.46,74.4 125.898,74.962 121.178,74.962 120.038,76.101 120.038,88.408 125.6,93.97 144.87,93.97 147.275,96.375 147.546,96.646 147.546,98.454 ccw(c146.907,98.454) 146.907,99.093 U2.4@144.262,99.093
ETH_RESET: U1.87 U2.10 | length 38
  Top Layer w0.2: U1.87@139.4,82.95 139.4,87.425 140.6,88.625 142.735,88.625 150.5,96.39 150.5,107.8 149.8,108.5 147.6,108.5 145.813,106.713 U2.10@144.262,106.713
ETH_SEL: U1.14 U2.9 | length 71.9
  Top Layer w0.2: U1.14@132.45,76 123.6,76 122.6,77 121,77 120.492,77.508 120.492,87.992 126.016,93.516 145.058,93.516 148,96.458 148,99 v1(147,100) ; U2.9@144.262,105.443 145.543,105.443 147.1,107 v1(148,107)
  Bottom Layer w0.254: v1(147,100) 145.8,100 145.3,100.5 145.3,104.3 v1(148,107)
FLASH_SEL: U1.50 U4.7 | length 22.2
  Top Layer w0.2: U1.50@143.8,69.85 143.8,66.6 145,65.4 v1(145,63.5) ; v1(145,52.457) 145.575,51.881 U4.7@145.575,48.35
  Bottom Layer w0.2: v1(145,52.457) v1(145,63.5)